# Altium PCB Traffic-PCB.PcbDoc
Units mil, origin at the board's own origin, x right, y up, seen from the top; angles counter-clockwise.
Board outline 6000 x 4000 mil, 2 copper layers (Top Layer, Bottom Layer); 15 components, 15 nets, 60 pads, 0 vias.
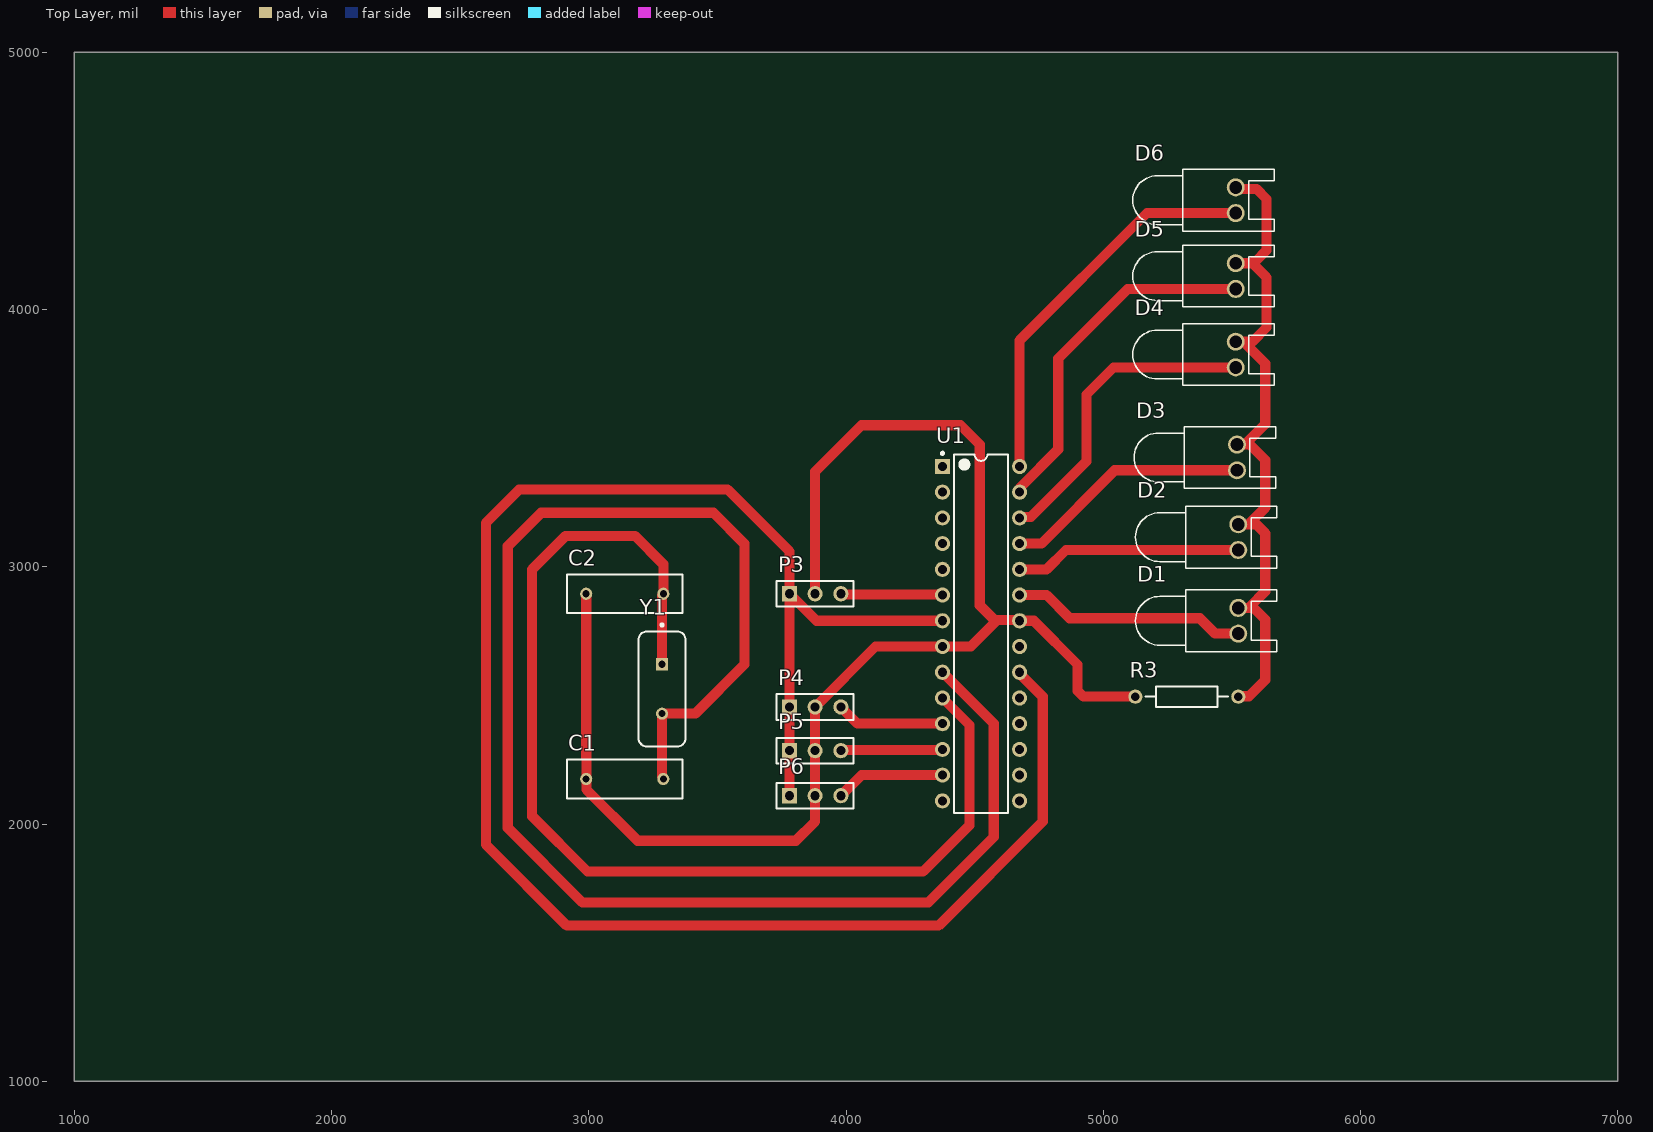
[diagram p0: Top Layer view]
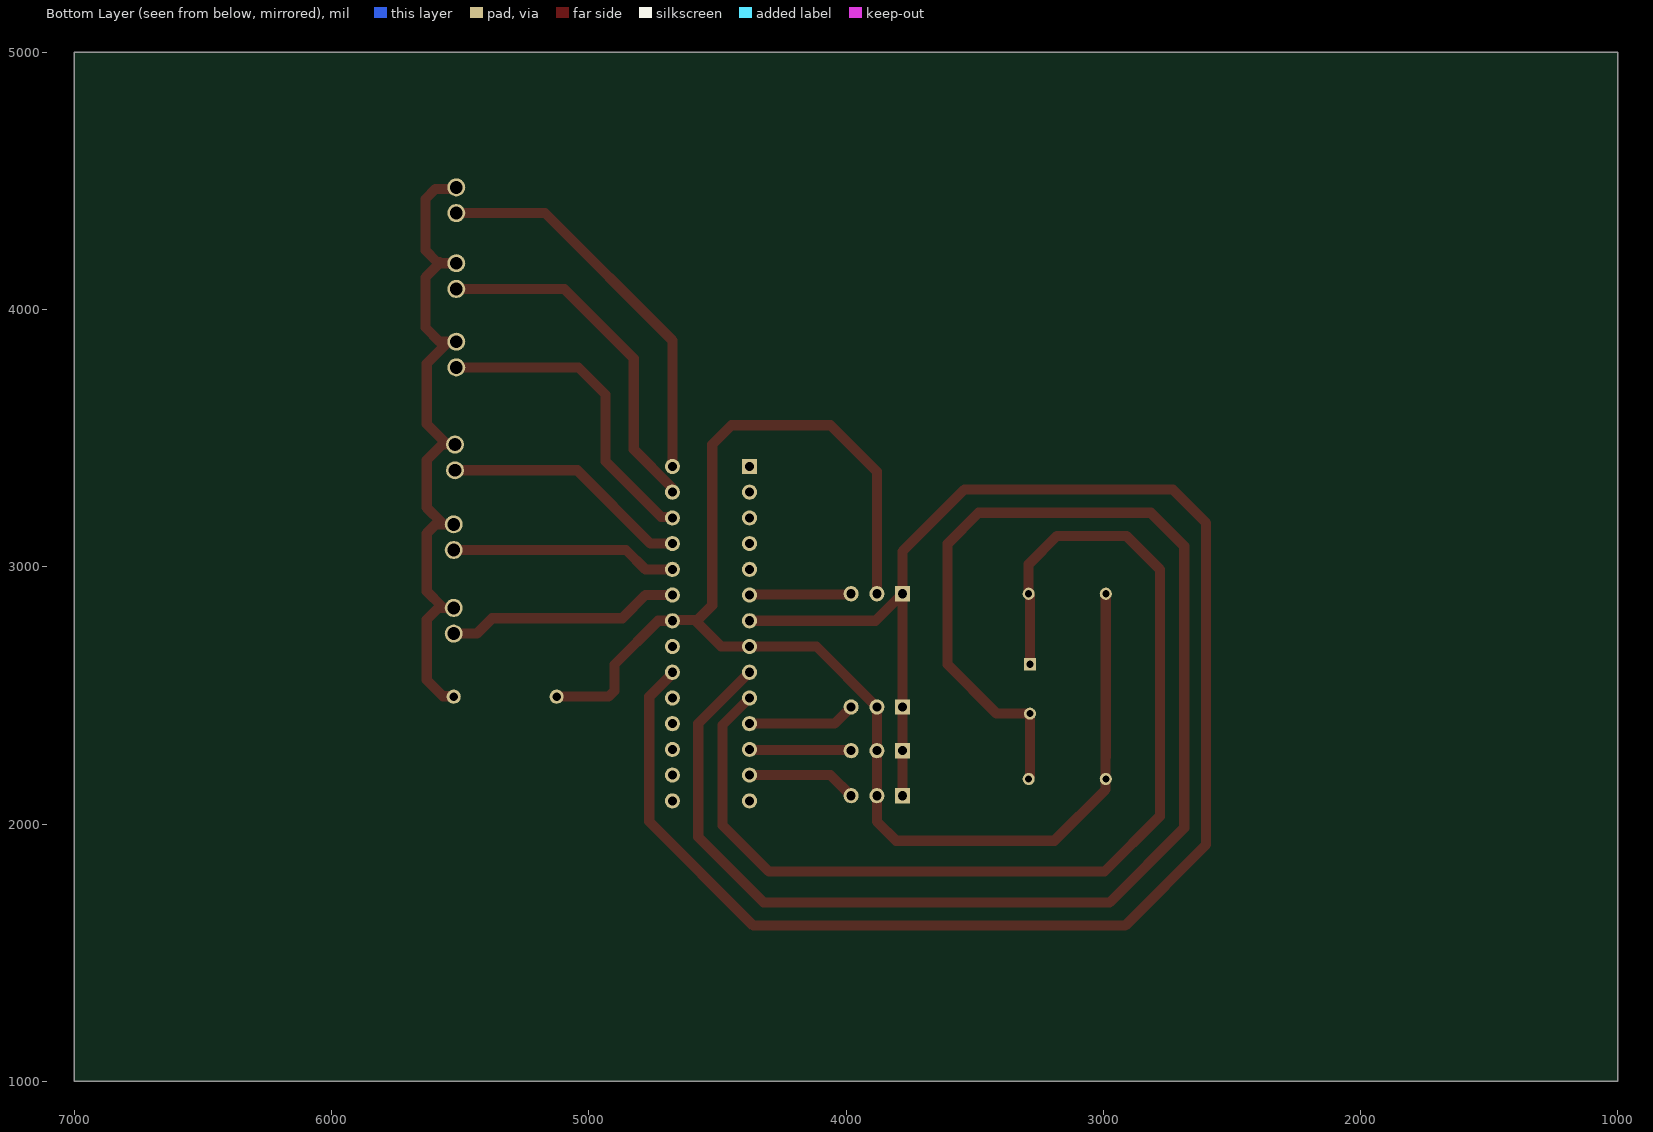
[diagram p1: Bottom Layer view, seen from below]

## Layer stack, top to bottom
Top Solder: solder mask 0.4, Solder Resist, Dk 3.5
Top Layer: signal copper 1.4
Dielectric 1: dielectric 12.6, FR-4, Dk 4.8
Bottom Layer: signal copper 1.4
Bottom Solder: solder mask 0.4, Solder Resist, Dk 3.5

## Board outline
1000,1000 7000,1000 7000,5000 1000,5000

## Design rules (kind name [scope] priority, off if disabled: settings)
Clearance [All] p1: gap=10 ignorepadtopadclearanceinfootprint=FALSE except(0: Arc-Hole Track-Hole SMDPad-Hole THPad-Hole Via-Hole Fill-Hole Poly-Hole Region-Hole Text-Hole)
PolygonConnect [All] p1: connectstyle=Relief reliefconductorwidth=10 reliefentries=4 polygonreliefangle="90 Angle" airgapwidth=10
RoutingVias [All] p1: holewidth=28 width=50 viastyle="Through Hole" minholewidth=28 minwidth=50 maxholewidth=28 maxwidth=50
SolderMaskExpansion [All] p1: expansion=4 istentingtop=FALSE
Width [All] p1: maxlimit=39.37 minlimit=10 preferedwidth=39.37 toplayer_minwidth=39.37 bottomlayer_maxwidth=10 bottomlayer_prefwidth=10 minimp=50.000000 maximp=50.000000 favimp=50.000000
30 further rules are at their usual default settings.

## Components (designator, comment, footprint, x,y, rotation, side; value= is the part's Value field where it differs from the comment)
C1 "Cap" RAD-0.3 3140,2175 r0 top value=22pF
C2 "Cap" RAD-0.3 3140,2895 r0 top value=22pF
D1 "LED0" LED-0 5525,2790 r270 top
D2 "LED0" LED-0 5525,3115 r270 top
D3 "LED0" LED-0 5520,3425 r270 top
D4 "LED0" LED-0 5515,3825 r270 top
D5 "LED0" LED-0 5515,4130 r270 top
D6 "LED0" LED-0 5515,4425 r270 top
P3 "Header 3" HDR1X3 3780,2895 r0 top
P4 "Header 3" HDR1X3 3780,2455 r0 top
P5 "Header 3" HDR1X3 3780,2285 r0 top
P6 "Header 3" HDR1X3 3780,2110 r0 top
R3 "Res2" AXIAL-0.4 5325,2495 r0 top value=1K
U1 "ATmega328-PU" 28P3 4525,2740 r0 top
Y1 "FOXSLF/160-20" FOX-FOXSLF160-20 3285,2525 r270 top

## Footprints (in the part's own frame and the unit in brackets; to place one, negate y for a bottom-side part, rotate by r counter-clockwise, add the part's x,y. Pads: shape width x height; smd on the part's side, far side on the other; paste and mask are expansions set on the pad)
28P3 [mm] "28-Pin Plastic Dual In-Line Package (PDIP)"
  rect 1.5x1.5 hole 0.9: 1(-3.81,16.51)
  round 1.5 hole 0.9: 2(-3.81,13.97) 3(-3.81,11.43) 4(-3.81,8.89) 5(-3.81,6.35) 6(-3.81,3.81) 7(-3.81,1.27) 8(-3.81,-1.27) 9(-3.81,-3.81) 10(-3.81,-6.35) 11(-3.81,-8.89) 12(-3.81,-11.43) 13(-3.81,-13.97) 14(-3.81,-16.51) 15(3.81,-16.51) 16(3.81,-13.97) 17(3.81,-11.43) 18(3.81,-8.89) 19(3.81,-6.35) 20(3.81,-3.81) 21(3.81,-1.27) 22(3.81,1.27) 23(3.81,3.81) 24(3.81,6.35) 25(3.81,8.89) 26(3.81,11.43) 27(3.81,13.97) 28(3.81,16.51)
  silkscreen extent -3.93,-17.7 2.65,17.93, body extent -3.6,-17.65 3.6,17.65, height 4.58
AXIAL-0.4 [mm] "Axial Device, Thru-Hole; 2 Leads; 0.4 in Pin Spacing"
  round 1.4 hole 0.85: 1(-5.08,0) 2(5.08,0)
  silkscreen extent -4.06,-1.02 4.06,1.02
FOX-FOXSLF160-20 [mm] "THD, 2-Leads, Body 11.35x4.65mm"
  rect 1.2x1.2 hole 0.7: 1(-2.44,0)
  round 1.2 hole 0.7: 2(2.44,0)
  silkscreen extent -6.45,-2.32 5.68,2.32, body extent -5.67,-2.32 5.68,2.33, height 3.6
HDR1X3 [mm] "Connector; Header; 3 Position"
  rect 1.5x1.5 hole 0.9: 1(0,0)
  round 1.5 hole 0.9: 2(2.54,0) 3(5.08,0)
  silkscreen extent -1.27,-1.27 6.35,1.27
LED-0 [mil] "LED; 2 Leads"
  round 70 hole 50: 1(50,0) 2(-50,0)
  silkscreen extent -120,-400 120,150
RAD-0.3 [mm] "Radial Cap, Thru-Hole; 2 Leads; 0.3 in Pin Spacing"
  round 1.2 hole 0.7: 1(-3.81,0) 2(3.81,0)
  silkscreen extent -5.71,-1.91 5.71,1.91

## Part data
C1 C2: "Capacitor", LatestRevisionDate=17-Jul-2002, LatestRevisionNote="Re-released for DXP Platform.", PackageDescription="Radial Cap, Thru-Hole; 2 Leads; 0.3 in Pin Spacing", PackageReference=RAD-0.3, Published=8-Jun-2000, Publisher="Altium Limited"
D1 D2 D3 D4 D5 D6: "Typical INFRARED GaAs LED", LatestRevisionDate=08-Jul-2005, LatestRevisionNote="Mech Layer 1 removed.", PackageDescription="LED; 2 Leads", PackageReference=LED-0, Published=8-Jun-2000, Publisher="Altium Limited"
P3 P4 P5 P6: "Header, 3-Pin", LatestRevisionDate=17-Jul-2002, LatestRevisionNote="Re-released for DXP Platform.", Publisher="Altium Limited"
R3: "Resistor", LatestRevisionDate=17-Jul-2002, LatestRevisionNote="Re-released for DXP Platform.", PackageDescription="Axial Device, Thru-Hole; 2 Leads; 0.4 in Pin Spacing", PackageReference=AXIAL-0.4, Published=8-Jun-2000, Publisher="Altium Limited"
U1: library part CMP-0095-00015-2, "8-bit AVR Microcontroller, 32KB Flash, 1KB EEPROM, 2KB SRAM, 28-pin PDIP, Industrial Grade (-40°C to 85°C)", ComponentLink1Description="Manufacturer URL", ComponentLink1URL=http://www.atmel.com/, ComponentLink2Description="ATmega48A/48PA/88A/88PA/168A/168PA/328/328P Datasheet", ComponentLink2URL=http://www.atmel.com/dyn/resources/prod_documents/8271.pdf, ComponentLink3Description="ATmega48A/48PA/88A/88PA/168A/168PA/328/328P Summary", ComponentLink3URL=http://www.atmel.com/dyn/resources/prod_documents/8271S.pdf, DatasheetVersion="revD, May-2011", PackageDescription="28-lead (0.300\"/7.62mm Wide) Plastic Dual Inline Package (PDIP)", PackageReference=28P3, PackageVersion="revB, Sep-2001", RevisionNote="DatasheetVersion updated. URLs added."
Y1: library part CMP-1749-00003-1, "Resistance Weld Thru-Hole Crystal, 16 MHz, -20 to 70 degC, 2-Pin THD, RoHS, Bulk", Case\Package=Axial, Max Operating Temperature="155 degC", Min Operating Temperature="-55 degC", Package Quantity=200, Power Rating="250 mW", Resistance="221 kohm", Tolerance=1%, Voltage Rating="250 V", ComponentLink1Description="Manufacturer URL", ComponentLink1URL=http://www.foxonline.com/, ComponentLink2Description=Datasheet, ComponentLink2URL=http://www.foxonline.com/pdfs/hc49slf.pdf, DatasheetVersion=Mar-15, Length="0.248 inch", Mount="Through Hole", PackageDescription="2-Pin Through Hole Device, Body 11.35 x 4.65 mm", PackageReference=FOXSLF160-20, Packaging=Bulk, RoHSCompliant=true

## Nets (pads, with @x,y where several pads share a name; then routed paths per layer and width w, separated by ;. In a path a pad name is that pad's centre, name@x,y a point inside that pad or via, vN(x,y) a via of type N, cw(c..) or ccw(c..) an arc to the next point about the centre after c; other vN are vias at no path point)
GND: C1.1 C2.1 P3.2 P4.2 P5.2 P6.2 R3.1 U1.8 U1.22 | length 5699.1
  Top Layer w39.37: C2.1 2990,2260 2991.51,2258.49 2991.51,2133.49 3190,1935 3805,1935 3880,2010 P5.2 P4.2@3880,2438.74 ; P4.2 4115,2690 4485,2690 4588.77,2793.77 ; P3.2 3880,3370 4060,3550 4445,3550 4520,3475 4520,2850 4576.23,2793.77 4671.23,2793.77 U1.22 4730,2790 4900,2620 4900,2518.06 4923.06,2495 R3.1
IR1: P3.3 U1.6 | length 397.1
  Top Layer w39.37: P3.3 3982.5,2892.5 4372.5,2892.5 U1.6
IR2: P4.3 U1.11 | length 421.9
  Top Layer w39.37: P4.3 4045,2390 U1.11
IR3: P5.3 U1.12 | length 397.1
  Top Layer w39.37: P5.3 3982.5,2287.5 4372.5,2287.5 U1.12
IR4: P6.3 U1.13 | length 428.1
  Top Layer w39.37: P6.3 4060,2190 U1.13
NetC1_2: C1.2 U1.9 Y1.2 | length 6081.8
  Top Layer w39.37: C1.2 3290,2177.13 3285,2182.13 Y1.2 3413.94,2428.94 3605,2620 3605,3090 3485,3210 2815,3210 2685,3080 2685,1985 2975,1695 4320,1695 4574.37,1949.37 4574.37,2390.63 U1.9
NetC2_2: C2.2 U1.10 Y1.1 | length 4362.5
  Top Layer w39.37: Y1.1 3285,2887.87 3290,2892.87 3290,3010 3180,3120 2910,3120 2780,2990 2780,2030 2995,1815 4300,1815 4480,1995 4480,2385 U1.10
NetD1_1: D1.1 U1.23 | length 912.1
  Top Layer w39.37: U1.23 4780,2890 4870,2800 5375,2800 5435,2740 D1.1
NetD1_2: D1.2 D2.2 D3.2 D4.2 D5.2 D6.2 R3.2 | length 2675.2
  Top Layer w39.37: D4.2 D4.2@5545,3875 ; D5.2 5580,4180 5635,4125 5635,3930 5580,3875 D4.2@5545,3875 ; D6.2 5520.86,4469.14 5595.86,4469.14 5635,4430 5635,4230 5589.64,4184.64 5580,4184.64 ; D3.2 5570,3475 5630,3415 5630,3230 5570.86,3170.86 ; R3.2 5526.88,2496.88 5566.88,2496.88 5630,2560 5630,2795 5585,2840 D1.2 ; D2.2 5595,3165 5630,3130 5630,2905 5570.86,2845.86 ; 5555.86,3480.86 5630,3555 5630,3790 D4.2@5545,3875
NetD2_1: D2.1 U1.24 | length 881.1
  Top Layer w39.37: U1.24 4780,2990 4855,3065 D2.1
NetD3_1: D3.1 U1.25 | length 963.1
  Top Layer w39.37: U1.25 4760,3090 5045,3375 D3.1
NetD4_1: D4.1 U1.26 | length 1234.6
  Top Layer w39.37: U1.26 4678.27,3193.27 4718.27,3193.27 4935,3410 4935,3670 5040,3775 D4.1
NetD5_1: D5.1 U1.27 | length 1384
  Top Layer w39.37: U1.27 4678.77,3293.77 4678.77,3310.03 4825,3456.26 4825,3810 5095,4080 D5.1
NetD6_1: D6.1 U1.28 | length 1535
  Top Layer w39.37: U1.28 4675,3880 5170,4375 D6.1
VCC: P3.1 P4.1 P5.1 P6.1 U1.7 U1.20 | length 7252.3
  Top Layer w39.37: P6.1 P5.1 P4.1 P3.1 ; U1.7 3885,2790 P3.1 ; U1.20 4675,2584.67 4765,2494.67 4765,2010 4360,1605 2915,1605 2600,1920 2600,3170 2730,3300 3540,3300 3780,3060 P3.1
pads on no net: U1.1 U1.2 U1.3 U1.4 U1.5 U1.14 U1.15 U1.16 U1.17 U1.18 U1.19 U1.21